# Altium PCB peripheral.PCBDOC (part 3 of 4)
Units mil, origin at the board's own origin, x right, y up, seen from the top; angles counter-clockwise.
Board outline 7500 x 3963 mil, 6 copper layers (Top Layer, Internal Plane 1, MidLayer1, MidLayer2, Internal Plane 2, Bottom Layer); 212 components, 387 nets, 1676 pads, 795 vias.
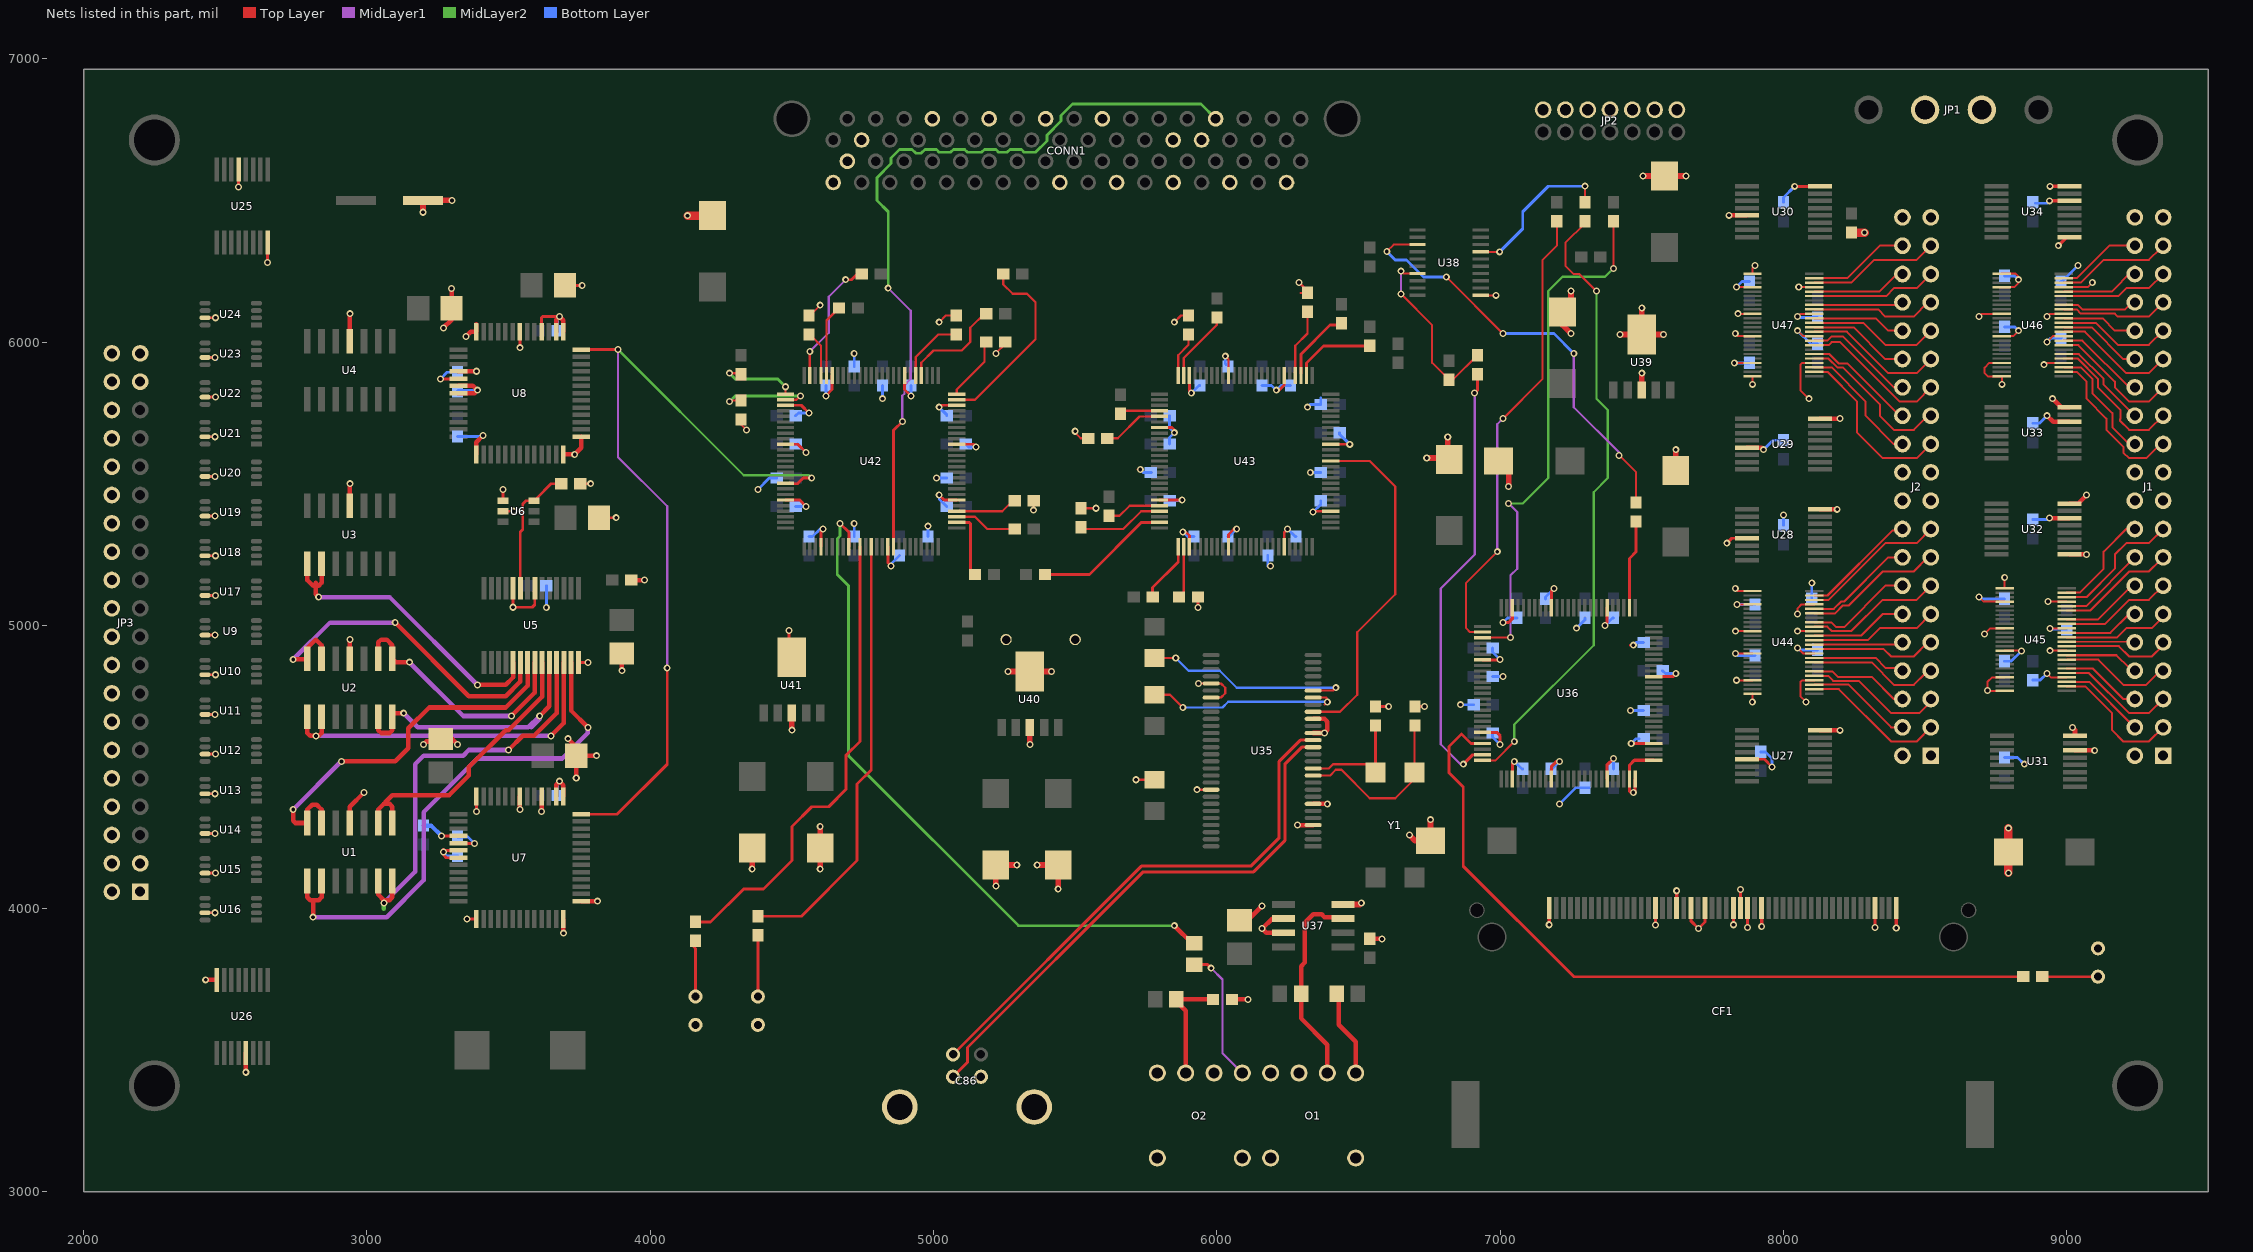
[diagram p7: the nets of this part, all layers, seen from the top]

## Via types
v1: diameter 25, hole 13.5, Top Layer to Bottom Layer, 795 vias

## Nets (pads, with @x,y where several pads share a name; then routed paths per layer and width w, separated by ;. In a path a pad name is that pad's centre, name@x,y a point inside that pad or via, vN(x,y) a via of type N, cw(c..) or ccw(c..) an arc to the next point about the centre after c; other vN are vias at no path point) (continued)
GND: C13.1 C14.1 C15.2 C16.2 C17.2 C18.1 C19.1 C20.1 C29.1 C30.1 C31.1 C32.2 C33.2 C34.2 C35.2 C36.1 C37.1 C38.1 C39.1 C40.1 C44.2 C45.2 C46.2 C47.2 C48.2 C49.2 C50.2 C51.2 C52.2 C53.2 C54.2 C55.2 C56.2 C57.2 C58.2 C59.2 C68.2 C69.2 C70.2 C71.2 C72.2 C73.2 C74.2 C75.2 C76.2 C77.2 C78.2 C79.2 C80.2 C81.2 C82.2 C83.2 C84.2 C85.1 C86.4 C86.5 C86.6 C88.2 C89.2 C90.2 C91.2 C92.2 C93.2 C94.2 C95.2 C96.2 C97.2 C98.2 C99.2 C100.2 C101.2 C102.2 C103.2 C104.2 C105.2 C106.2 C107.1 C108.1 C115.1 C116.1 C118.2 C119.2 C120.2 C121.2 C122.2 C123.2 C124.1 C125.1 C126.1 C127.1 C128.1 C129.1 C130.1 C131.1 C134.1 C135.1 C136.1 C137.2 C138.1 C139.1 C140.1 C141.1 C146.2 C147.2 C148.2 C149.2 C150.2 C151.2 C152.2 CF1.1 CF1.10 CF1.11 CF1.12 CF1.14 CF1.15 CF1.16 CF1.24 CF1.33 CF1.39 CF1.50 CONN1.1 CONN1.2 CONN1.17 CONN1.21 CONN1.25 CONN1.29 CONN1.33 CONN1.37 CONN1.42 CONN1.46 CONN1.50 CONN1.54 CONN1.59 CONN1.61 DS1.2 DS2.2 DS3.2 J1.1 J1.2 J1.19 J1.20 J1.21 J1.22 J1.39 J1.40 J2.1 J2.2 J2.19 J2.20 J2.21 J2.22 J2.39 J2.40 JP1.2 JP1.3 JP2.1 JP2.3 JP2.5 JP2.7 JP2.9 JP2.11 JP2.13 JP3.1 JP3.2 JP3.3 JP3.4 JP3.6 JP3.8 JP3.10 JP3.12 JP3.14 JP3.16 JP3.18 JP3.20 JP3.22 JP3.24 JP3.26 JP3.28 JP3.30 JP3.32 JP3.34 JP3.36 JP3.37 JP3.38 JP3.39 JP3.40 O1.3 O1.4 O1.5 O1.8 O2.2 O2.4 O2.5 O2.8 pad.0@5500,4950 pad.1@5256,4950 R1.1 R4.1 R5.1 R8.1 R10.1 R14.1 R17.1 R18.1 R21.1 R23.1 R27.1 U1.11 U2.11 U3.11 U4.11 U5.14 U5.21 U5.24 U6.1 U6.2 U7.4 U7.6 U7.7 U7.14 U7.26 U7.27 U7.40 U7.41 U7.43 U7.46 U7.52 U8.4 U8.6 U8.7 U8.14 U8.26 U8.27 U8.40 U8.41 U8.43 U8.46 U8.52 U9.7 U10.7 U11.7 U12.7 U13.7 U14.7 U15.7 U16.7 U17.7 U18.7 U19.7 U20.7 U21.7 U22.7 U23.7 U24.7 U25.8 U25.13 U26.8 U26.13 U27.8 U27.13 U28.8 U28.13 U29.8 U29.13 U30.8 U30.13 U31.6 U31.8 U32.1 U32.6 U32.8 U33.6 U33.8 U34.1 U34.6 U34.8 U35.4 U35.7 U35.17 U35.19 U35.33 U35.35 U35.48 U36.3 U36.10 U36.20 U36.24 U36.25 U36.26 U36.29 U36.41 U36.56 U36.66 U36.73 U36.82 U36.95 U37.4 U37.6 U37.7 U38.11 U39.3 U40.3 U41.3 U42.3 U42.10 U42.20 U42.29 U42.41 U42.56 U42.66 U42.73 U42.82 U42.95 U43.3 U43.10 U43.20 U43.29 U43.41 U43.56 U43.66 U43.73 U43.82 U43.95 U44.4 U44.10 U44.15 U44.21 U44.25 U44.28 U44.34 U44.39 U44.45 U44.48 U45.4 U45.10 U45.15 U45.21 U45.25 U45.28 U45.34 U45.39 U45.45 U45.48 U46.4 U46.10 U46.15 U46.21 U46.25 U46.28 U46.34 U46.39 U46.45 U46.48 U47.4 U47.10 U47.15 U47.21 U47.25 U47.28 U47.34 U47.39 U47.45 U47.48 | length 19395.9
  Top Layer w7: U38.11@6931.22,6164.84 v1(6985.16,6164.84) ; v1(7826.54,5926.54) 7826.93,5926.14 U47.45@7890.75,5926.14 ; v1(7830,5130) 7838.9,5121.1 U44.25@7890.75,5121.1 ; v1(7830,6030) 7839.37,6020.63 U47.39@7890.75,6020.63 ; v1(7830.63,4900.63) U44.39@7890.75,4900.63 ; v1(7830.63,4979.37) U44.34@7890.75,4979.37 ; v1(7833.86,4806.14) U44.45@7890.75,4806.14 ; v1(7833.86,6193.86) U47.28@7890.75,6193.86 ; v1(7836.14,5073.86) U44.28@7890.75,5073.86 ; v1(7840,6100) 7839.37,6099.37 U47.34@7890.75,6099.37 ; v1@7890.75,4740.75 U44.48@7890.75,4758.9 ; v1(7890.75,5850.75) U47.48@7890.75,5878.9 ; U47.25@7890.75,6241.1 7890.75,6260.75 v1(7900,6270) ; v1(8049.37,4979.37) U44.15@8109.25,4979.37 ; v1(8050,4920) 8069.37,4900.63 U44.10@8109.25,4900.63 ; v1(8050,5040) 8050,5060.2 8063.66,5073.86 U44.21@8109.25,5073.86 ; v1(8050,6040) 8069.37,6020.63 U47.10@8109.25,6020.63 ; v1(8050,6090) 8059.37,6099.37 U47.15@8109.25,6099.37 ; v1(8053.86,6193.86) U47.21@8109.25,6193.86 ; v1(8080,4730) 8060,4750 8060,4800 8066.14,4806.14 U44.4@8109.25,4806.14 ; v1(8090,5800) 8060,5830 8060,5920 8066.14,5926.14 U47.4@8109.25,5926.14 ; v1(8690,5100) 8706.14,5083.86 U45.28@8780.75,5083.86 ; v1(8690,6090) 8699.37,6099.37 U46.34@8770.75,6099.37 ; v1(8710,4970) 8729.37,4989.37 U45.34@8780.75,4989.37 ; v1(8770.75,5850.75) U46.48@8770.75,5878.9 8721.1,5878.9 8710,5890 8710,5910 8726.14,5926.14 U46.45@8770.75,5926.14 ; U46.39@8770.75,6020.63 8810.63,6020.63 v1(8830,6040) ; U46.28@8770.75,6193.86 8813.86,6193.86 8830,6210 8830,6230 8818.9,6241.1 U46.25@8770.75,6241.1 ; U45.48@8780.75,4768.9 8721.1,4768.9 v1(8720,4770) 8720,4800 8736.14,4816.14 U45.45@8780.75,4816.14 ; U45.39@8780.75,4910.63 8839.37,4910.63 v1(8840,4910) ; U45.25@8780.75,5131.1 v1(8780.75,5169.25) ; v1(8920,5920) 8926.14,5926.14 U46.4@8989.25,5926.14 ; v1(8930,4830) 8943.86,4816.14 U45.4@8999.25,4816.14 ; v1(8930,6000) 8950.63,6020.63 U46.10@8989.25,6020.63 ; v1(8930,6090) 8939.37,6099.37 U46.15@8989.25,6099.37 ; v1(8933.86,5083.86) U45.21@8999.25,5083.86 ; v1(8940.63,4910.63) U45.10@8999.25,4910.63 ; v1(8940.63,4989.37) U45.15@8999.25,4989.37 ; U46.21@8989.25,6193.86 9073.86,6193.86 v1(9090,6210)
  Top Layer w8: R10.1@4320,5726.54 4320,5710 v1(4340,5690) ; R8.1@4560,6093.46 4563.46,6093.46 v1(4600,6130) ; v1(5020,6070) 5043.46,6093.46 R5.1@5080,6093.46 ; v1(5220,5960) 5253.46,5993.46 R4.1@5253.46,6000 ; v1(5353.46,5406.54) R1.1@5353.46,5440 ; v1@5500,5680 5520,5660 R18.1@5546.54,5660 ; R21.1@5520,5413.46 v1(5573.46,5413.46) ; v1(5714.88,4455.12) R27.1@5780,4455.12 ; v1@5720,5550 v1(5730,5550) ; v1(5850,6070) 5873.46,6093.46 R17.1@5900,6093.46 ; v1(5930,4420) U35.48@5980,4420 ; v1(5935,4795) 6015,4795 6030,4780 6030,4760 6015,4745 U35.35@5980,4745 ; v1(6030,5950) 6040.94,5939.06 U43.66@6040.94,5882.17 ; v1(6290,6210) 6320,6180 R14.1@6320,6173.46 6296.54,6173.46
  Top Layer w10: U16.7@2428.9,3985.59 v1(2464.41,3985.59) ; U15.7@2428.9,4125.59 v1(2465.59,4125.59) ; U14.7@2428.9,4265.59 v1(2464.41,4265.59) ; U13.7@2428.9,4405.59 v1(2464.41,4405.59) ; U12.7@2428.9,4545.59 v1(2465.59,4545.59) ; U11.7@2428.9,4685.59 v1(2464.41,4685.59) ; U10.7@2428.9,4825.59 v1(2465.59,4825.59) ; U9.7@2428.9,4965.59 v1(2464.41,4965.59) ; U17.7@2428.9,5105.59 v1(2465.59,5105.59) ; U18.7@2428.9,5245.59 v1(2465.59,5245.59) ; U19.7@2428.9,5385.59 v1(2464.41,5385.59) ; U20.7@2428.9,5525.59 v1(2464.41,5525.59) ; U21.7@2428.9,5665.59 v1(2464.41,5665.59) ; U22.7@2428.9,5805.59 v1(2465.59,5805.59) ; U23.7@2428.9,5945.59 v1(2464.41,5945.59) ; U24.7@2428.9,6085.59 v1(2465.59,6085.59) ; v1(2547.21,6547.21) U25.13@2547.21,6608.94 ; v1(2649.57,6280.43) U25.8@2649.57,6351.06 ; v1(3263.23,4256.77) U7.4@3323.46,4256.77 ; U7.7@3323.46,4180 3280,4180 3270,4190 3270,4210 3274.41,4205.59 U7.6@3323.46,4205.59 ; v1(3353.46,3963.46) U7.14@3386.46,3963.46 ; v1(3386.46,4343.54) U7.52@3386.46,4396.54 ; U6.2@3480,5402.6 v1(3517.4,5402.6) ; U6.1@3480,5440 v1(3480,5480) ; U5.24@3516.02,5130.91 v1(3516.02,5063.98) 3583.98,5063.98 3592.8,5072.8 U5.21@3592.8,5130.91 ; v1(3540,5980) U8.46@3540,6036.54 ; U8.43@3616.77,6036.54 3616.77,6086.77 3620,6090 v1(3680,6090) ; C32.2@3699.06,6200 v1(3760,6200) ; U5.14@3746.34,4869.09 v1(3780.91,4869.09) ; C15.2@3753.46,5500 v1(3790,5500) ; C16.2@3819.06,5380 v1(3880,5380) ; U42.20@4477.83,5442.2 4527.8,5442.2 v1(4550,5420) ; U42.10@4477.83,5639.06 4520.94,5639.06 v1(4550,5610) ; U42.3@4477.83,5776.85 4533.15,5776.85 v1(4560,5750) ; U41.3@4490,4880 v1(4490,4982) ; U42.29@4602.83,5277.83 4602.83,5332.83 v1(4610,5340) ; v1(4620,5810) 4642.2,5832.2 U42.95@4642.2,5882.17 ; U42.41@4839.06,5277.83 4839.06,5220.94 v1(4850,5210) ; U42.82@4898.11,5882.17 4898.11,5831.89 v1(4920,5810) ; v1(5020,5460) 5037.8,5442.2 U42.56@5082.17,5442.2 ; v1(5020,5770) 5026.85,5776.85 U42.73@5082.17,5776.85 ; U42.66@5082.17,5639.06 5140.94,5639.06 v1(5150,5630) ; U43.95@5797.83,5442.2 v1(5877.8,5442.2) ; U43.82@5797.83,5698.11 5841.89,5698.11 5850,5690 v1(5850,5680) ; v1(5880,5330) 5890,5330 5903.15,5316.85 U43.3@5903.15,5277.83 ; U43.73@5903.15,5882.17 5903.15,5826.85 v1(5910,5820) ; v1(5933.46,5063.46) R23.1@5933.46,5100 ; U43.10@6040.94,5277.83 6040.94,5320.94 6060,5340 v1(6070,5340) ; v1(6210,5830) 6220,5830 6237.8,5847.8 U43.56@6237.8,5882.17 ; U43.20@6237.8,5277.83 6237.8,5327.8 v1(6250,5340) ; v1(6340,5400) 6342.83,5402.83 U43.29@6402.17,5402.83 ; U43.41@6402.17,5639.06 v1(6469.06,5639.06) ; v1@7460,4930 v1(7470,4930) ; v1(7800,5290) 7817.21,5307.21 U28.13@7871.06,5307.21 ; U27.13@7871.06,4527.21 7932.8,4527.21 v1(7960,4500)
  Top Layer w11: C84.2@6560,4713.46 v1(6606.54,4713.46) ; C85.1@6700,4713.46 v1(6733.46,4713.46) ; U36.95@6937.83,4622.2 6987.8,4622.2 7000,4610 v1(7000,4580) ; U36.82@6937.83,4878.11 6998.11,4878.11 v1(7000,4880) ; v1(7010,5010) 7030,5010 7043.15,5023.15 U36.73@7043.15,5062.17 ; U36.3@7043.15,4457.83 7043.15,4513.15 v1(7050,4520) ; v1(7173.13,3943.13) CF1.1@7173.13,4002.36 ; U36.10@7180.94,4457.83 7180.94,4500.94 7200,4520 v1(7210,4520) ; U36.66@7180.94,5062.17 7180.94,5120.94 v1(7190,5130) ; v1(7370,5000) 7377.8,5007.8 U36.56@7377.8,5062.17 ; U36.20@7377.8,4457.83 7377.8,4507.8 v1(7400,4530) ; v1(7462.83,4582.83) U36.29@7542.17,4582.83 ; U36.25@7476.22,4457.83 7476.22,4416.22 v1(7470,4410) 7460,4410 7456.54,4413.46 7456.54,4506.54 7473.78,4523.78 U36.26@7542.17,4523.78 ; U36.41@7542.17,4819.06 7609.06,4819.06 v1(7620,4830) ; v1(7548.13,3941.87) CF1.33@7548.13,4002.36 ; CF1.10@7623.13,4002.36 v1(7623.13,4063.13) ; CF1.11@7673.13,4002.36 7673.13,3956.87 v1(7700,3930) 7723.13,3953.13 CF1.12@7723.13,4002.36 ; v1(7823.13,3943.13) CF1.14@7823.13,4002.36 ; CF1.39@7848.13,4002.36 v1(7848.13,4068.13) ; v1(7873.13,3933.13) CF1.15@7873.13,4002.36 ; v1(7923.13,3936.87) CF1.16@7923.13,4002.36 ; v1(8039.57,6549.57) U30.8@8128.94,6549.57 ; v1(8323.13,3933.13) CF1.24@8323.13,4002.36 ; v1(8398.13,3931.87) CF1.50@8398.13,4002.36
  Top Layer w12: v1(8938.39,6498.39) U34.6@9008.94,6498.39 ; v1(8940.43,6549.57) U34.8@9008.94,6549.57 ; v1(8970,6340) 9000.43,6370.43 U34.1@9008.94,6370.43
  Top Layer w16: v1(2431.06,3748.94) U26.8@2470.43,3748.94 ; v1(2572.8,3422.8) U26.13@2572.8,3491.06 ; U1.11@2940,4302.36 2940,4360 v1(2990,4410) ; U2.11@2940,4882.36 v1(2940,4950) ; U3.11@2940,5422.36 v1(2940,5500) ; U4.11@2940,6002.36 v1(2940,6100) ; v1(3200,4580) 3210,4590 C35.2@3260,4590 ; C35.2@3260,4599.06 3300.94,4599.06 v1(3320,4580) ; v1(3270,6050) 3299.06,6079.06 v1(3299.06,6189.06) ; U8.7@3323.46,5820 3380,5820 v1(3390,5830) 3374.41,5845.59 U8.6@3323.46,5845.59 ; U8.4@3323.46,5896.77 v1(3386.77,5896.77) ; v1(3350,6020) 3366.54,6036.54 U8.52@3386.46,6036.54 U8.52@3386.46,6063.54 ; U8.14@3386.46,5603.46 3386.46,5646.46 v1(3410,5670) ; v1(3540,4350) U7.46@3540,4396.54 ; v1(3616.77,4343.23) U7.43@3616.77,4396.54 ; U7.41@3667.95,4396.54 3667.95,4437.95 v1(3680,4450) 3693.54,4436.46 U7.40@3693.54,4396.54 ; U8.41@3667.95,6036.54 3667.95,6077.95 v1(3680,6090) 3693.54,6076.46 U8.40@3693.54,6036.54 ; v1(3693.54,3913.54) U7.26@3693.54,3963.46 ; U8.26@3693.54,5603.46 v1(3733.46,5603.46) 3756.54,5626.54 U8.27@3756.54,5666.46 ; v1(3710,4600) C34.2@3740,4570 ; v1(3739.06,4460.94) C34.2@3739.06,4540 v1(3810,4540) ; U7.27@3756.54,4026.46 v1(3813.54,4026.46) ; v1(3900,4840) C17.2@3900,4900.94 ; C14.1@3933.46,5160 v1(3980,5160) ; C105.2@6053.46,3680 v1(6110,3680) ; C106.2@6080,3959.06 6109.06,3959.06 v1(6160,4010) ; U37.7@6234.69,3915 6175,3915 v1(6160,3930) 6195,3965 U37.6@6234.69,3965 ; v1(6285,4295) U35.4@6340,4295 ; U35.7@6340,4370 v1(6390,4370) ; U35.17@6340,4620 v1(6380,4620) 6390,4630 6390,4660 6380,4670 U35.19@6340,4670 ; C104.2@6540,3893.46 v1(6583.46,3893.46) ; v1(7807.21,6447.21) U30.13@7871.06,6447.21 ; U29.13@7871.06,5627.21 7922.8,5627.21 v1(7930,5620) ; U27.8@8128.94,4629.57 v1(8199.57,4629.57) ; U28.8@8128.94,5409.57 v1(8189.57,5409.57) ; U29.8@8128.94,5729.57 v1(8199.57,5729.57) ; v1(8930,5740) 8951.61,5718.39 U33.6@9008.94,5718.39 ; v1(8938.39,5378.39) U32.6@9008.94,5378.39 ; v1(8950,5800) 8980.43,5769.57 U33.8@9008.94,5769.57 ; U32.1@9008.94,5250.43 v1(9069.57,5250.43) ; U32.8@9008.94,5429.57 9039.57,5429.57 v1(9070,5460) ; v1(9020,4640) 9028.94,4631.06 U31.8@9028.94,4609.57 ; U31.6@9028.94,4558.39 v1(9098.39,4558.39)
  Top Layer w20: v1(3198.11,6458.11) C123.2@3198.11,6500 v1(3300,6500) ; v1(4360,4140) C149.2@4360,4214.02 ; v1(4500,4630) U41.3@4500,4690 ; v1(4600,4140) v1(4600,4290) ; v1(5220,4080) C148.2@5220,4154.02 v1(5294.02,4154.02) ; v1(5263.15,4836.85) v1(5416.85,4836.85) ; v1(5340,4580) U40.3@5340,4640 ; v1(5365.98,4154.02) C152.2@5440,4154.02 v1(5440,4070) ; U37.4@6445.32,4015 6505,4015 v1(6510,4020) ; v1(6680,4260) 6700,4240 C119.2@6754.02,4240 v1(6754.02,4314.02) ; v1(6740.93,5590.93) 6814.94,5590.93 v1(6814.94,5664.94) ; C146.2@6994.02,5580 6994.02,5575.98 7030,5540 v1(7030,5490) ; C118.2@7220,6105.98 7220,6060 v1(7250,6030) ; C118.2@7250,6110 v1(7250,6180) ; v1(7423.15,6026.85) v1(7576.85,6026.85) ; U39.3@7500,5830 v1(7500,5890) ; U39.3@7500,6026.85 v1(7500,6120) ; v1(7504.02,6585.98) v1(7655.98,6585.98) ; C122.2@7620,5545.98 v1(7620,5620)
  Top Layer w30: v1(4132.02,6445.98) C151.2@4220,6445.98 ; C36.1@8240,6386.54 v1(8286.54,6386.54) ; v1(8794.02,4125.98) v1(8794.02,4284.02)
  MidLayer1 w8: v1(7576.85,6026.85) v1@7580,6030
  MidLayer1 w16: v1@4131,6447 v1(4132.02,6445.98)
  MidLayer2 w8: v1@2430,3750 v1(2431.06,3748.94)
  Bottom Layer w10: v1(2464.41,5525.59) v1@2470,5520 ; v1(2464.41,5945.59) v1@2470,5940 ; v1(3270,4200) 3283.46,4186.54 C20.1@3320,4186.54 ; C19.1@3320,5666.54 3406.54,5666.54 v1(3410,5670) ; C31.1@3320,5826.54 3323.46,5830 v1(3390,5830) ; v1(3633.46,5063.46) C13.1@3633.46,5140 ; C29.1@3673.46,4400 3673.46,4443.46 v1(3680,4450) ; C18.1@3673.46,6040 v1@3673.46,6083.46 ; v1(4380,5480) 4420,5520 C54.2@4446.54,5520 ; C44.2@4513.46,5420 v1(4550,5420) ; C45.2@4513.46,5740 4523.46,5750 v1(4560,5750) ; C57.2@4520,5640 v1(4550,5610) ; C50.2@4560,5313.46 4573.46,5313.46 4600,5340 v1(4610,5340) ; v1(4620,5810) C47.2@4620,5846.54 ; C58.2@4720,5313.46 v1(4720,5360) ; C52.2@4720,5913.46 v1(4720,5960) ; v1(4820,5800) C59.2@4820,5846.54 ; v1(4850,5210) 4850,5216.54 C53.2@4880,5246.54 ; v1(4920,5810) C46.2@4920,5846.54 ; C49.2@4980,5313.46 v1(4980,5350) ; v1(5010,5520) C56.2@5046.54,5520 ; v1(5020,5460) 5020,5446.54 C51.2@5046.54,5420 ; v1(5020,5770) 5046.54,5743.46 C48.2@5046.54,5740 ; C55.2@5113.46,5640 5123.46,5630 v1(5150,5630) ; v1(5730,5550) 5740,5540 C78.2@5770,5540 ; C73.2@5833.46,5440 5875.59,5440 v1(5877.8,5442.2) ; C81.2@5833.46,5640 5833.46,5663.46 v1(5850,5680) 5833.46,5696.54 C72.2@5833.46,5740 ; v1(5880,5330) 5896.54,5313.46 C75.2@5920,5313.46 ; v1(5910,5820) 5936.54,5846.54 C71.2@5940,5846.54 ; v1(6030,5950) 6030,5923.46 C79.2@6033.46,5920 ; C82.2@6040,5313.46 6043.46,5313.46 v1(6070,5340) ; C80.2@6160,5846.54 6193.46,5846.54 v1(6210,5830) 6226.54,5846.54 C70.2@6260,5846.54 ; v1@6180,5210 C77.2@6180,5246.54 ; v1(6250,5340) 6276.54,5313.46 C74.2@6280,5313.46 ; v1(6320,5770) 6330,5780 C69.2@6366.54,5780 6366.54,5803.46 ; v1(6330,5540) C83.2@6366.54,5540 ; v1(6340,5400) 6366.54,5426.54 C68.2@6366.54,5440 ; C76.2@6433.46,5680 6433.46,5674.65 v1(6469.06,5639.06) ; v1(6860,4720) C99.2@6906.54,4720 ; C94.2@6973.46,4620 6973.46,4606.54 v1(7000,4580) ; C100.2@6973.46,4820 v1(7010,4820) ; C95.2@6973.46,4920 6973.46,4906.54 v1(7000,4880) ; v1(7010,5010) 7026.54,5026.54 C88.2@7060,5026.54 ; v1(7050,4520) 7076.54,4493.46 C93.2@7080,4493.46 ; C98.2@7160,5093.46 7160,5100 v1(7190,5130) ; C103.2@7180,4493.46 7183.46,4493.46 v1(7210,4520) ; v1(7210,4370) 7266.54,4426.54 C96.2@7313.46,4426.54 ; v1(7270,4990) 7300,5020 C101.2@7300,5026.54 ; v1(7370,5000) 7396.54,5026.54 C89.2@7400,5026.54 ; C92.2@7400,4493.46 v1(7400,4530) ; v1(7460,4700) C102.2@7506.54,4700 ; v1(7462.83,4582.83) 7480,4600 C91.2@7490,4600 ; v1(7470,4930) 7480,4940 C90.2@7506.54,4940 ; C97.2@7573.46,4840 7583.46,4830 v1(7620,4830) ; v1(7826.54,5926.54) C139.1@7880,5926.54 ; v1(7830.63,4900.63) 7837.79,4893.46 C141.1@7900,4893.46 ; v1(7833.86,6193.86) 7853.46,6213.46 C138.1@7880,6213.46 ; v1(7836.14,5073.86) 7836.54,5073.46 C140.1@7900,5073.46 ; C128.1@7920,4553.46 7936.54,4553.46 7960,4530 v1(7960,4500) ; v1(7930,5620) 7963.46,5653.46 C126.1@8000,5653.46 ; C127.1@8000,5353.46 v1(8000,5390) ; C124.1@8000,6493.46 8000,6510 v1(8039.57,6549.57) ; v1(8050,4920) 8056.54,4913.46 C40.1@8120,4913.46 ; v1(8050,6040) 8096.54,5993.46 C38.1@8120,5993.46 ; v1(8050,6090) 8053.46,6086.54 C37.1@8120,6086.54 ; C39.1@8100,5093.46 v1(8100,5150) ; v1(8690,5100) 8696.54,5093.46 C116.1@8780,5093.46 ; C129.1@8780,4533.46 8826.54,4533.46 v1(8850,4510) ; C115.1@8780,4873.46 8803.46,4873.46 v1(8840,4910) ; C108.1@8780,6053.46 8816.54,6053.46 v1(8830,6040) ; C107.1@8780,6233.46 8816.54,6233.46 v1(8830,6220) ; C134.1@8880,4806.54 8906.54,4806.54 v1(8930,4830) ; C130.1@8880,5373.46 8933.46,5373.46 v1(8938.39,5378.39) ; C131.1@8880,5713.46 8903.46,5713.46 v1(8930,5740) ; C125.1@8890,6490 8930,6490 v1(8938.39,6498.39) ; v1(8930,6000) 8943.46,6013.46 C135.1@8980,6013.46 ; v1(8940.63,4989.37) 8943.46,4986.54 C137.2@9000,4986.54 ; C136.1@8980,6213.46 8983.46,6213.46 v1(9040,6270)
  Bottom Layer w16: C30.1@3200,4293.46 3226.54,4293.46 v1(3263.23,4256.77)
  other v1: 7890,4730 6190,5210 5500,5685
IFCLK: U35.20 U43.38 | length 1235.9
  Top Layer w8: U35.20@6340,4695 6435,4695 6495.26,4755.26 6495.26,4975.26 6630,5110 6630,5490 6540,5580 U43.38@6402.17,5580
INIT: CONN1.56 U43.42 | length 1734.1
  Top Layer w10: U43.42@6402.17,5658.74 6448.74,5658.74 v1(6520,5730)
  MidLayer1 w8: v1(6380,6230) 6380,6030 6520,5890 v1(6520,5730)
  MidLayer2 w10: v1(5830,6460) 5840,6450 6160,6450 v1(6380,6230)
  Bottom Layer w10: CONN1.56@5696,6788 5696,6704 5740,6660 5740,6630 5800,6570 5800,6490 v1(5830,6460)
INIT: CONN1.62 U42.42 | length 2782.3
  Top Layer w10: U42.42@4858.74,5277.83 4858.74,5688.74 v1(4890,5720)
  MidLayer1 w8: v1(4840,6190) 4920,6110 4920,5870 4897.85,5847.85 4897.85,5817.85 4890,5810 v1(4890,5720)
  MidLayer2 w10: v1(4840,6190) 4840,6460 4800,6500 4800,6580 4850,6630 4850,6650 4880,6680 4924.29,6680 4938.22,6666.07 4956.07,6666.07 4970,6680 5010,6680 5020,6670 5060,6670 5070,6680 5110,6680 5120,6670 5170,6670 5180,6680 5220,6680 5230,6670 5260,6670 5270,6680 5310,6680 5320,6670 5360,6670 5400,6710 5400,6730 5450,6780 5450,6800 5490,6840 5944,6840 CONN1.62@5996,6788
L\D\A\C\: U7.39 U8.39 U42.17 | length 3001.6
  Top Layer w10: U7.39@3756.54,4333.54 3883.54,4333.54 4060,4510 v1(4060,4850) ; U8.39@3756.54,5973.54 v1(3886.46,5973.54) ; U42.17@4490,5500 4520,5500 4540,5520 v1(4570,5520)
  MidLayer1 w8: v1(3886.46,5973.54) 3886.46,5593.54 4060,5420 v1(4060,4850)
  MidLayer2 w8: v1(3886.46,5973.54) 4330,5530 4560,5530 v1(4570,5520)
LED0: R38.2 U42.38 | length 1560
  Top Layer w10: R38.2@4380,3973.46 4533.46,3973.46 4730,4170 4730,4440 4780,4490 U42.38@4780,5277.83
LED1: R39.2 U42.36 | length 1672.3
  Top Layer w10: R39.2@4160,3953.46 4213.46,3953.46 4330,4070 4400,4070 4500,4170 4500,4290 4570,4360 4630,4360 4691.63,4421.63 4691.63,4541.63 4740.63,4590.63 U42.36@4740.63,5277.83
NetC15_1: C15.1 U5.23 U6.6 | length 453.2
  Top Layer w10: U5.23@3541.61,5130.91 3541.61,5330 3550,5338.39 3550,5428.39 3561.61,5440 U6.6@3590.24,5440 ; U6.6@3600,5450 3650,5500 C15.1@3686.54,5500
NetC20_2: C20.2 U7.5 | length 139.7
  Top Layer w10: U7.5@3310,4230 v1(3380,4230)
  Bottom Layer w10: C20.2@3320,4253.46 3356.54,4253.46 v1(3380,4230)
NetC31_2: C31.2 U8.5 | length 139.7
  Top Layer w10: v1(3260,5870) U8.5@3330,5870
  Bottom Layer w10: v1(3260,5870) 3283.46,5893.46 C31.2@3320,5893.46
NetC84_1: C84.1 U35.12 Y1.1 | length 444.5
  Top Layer w8: U35.12@6340,4495 6395,4495 6410,4510 6540,4510 Y1.1@6560,4490 ; Y1.1@6560,4480 6560,4530
  Top Layer w11: Y1.1@6560,4480 C84.1@6560,4640
NetC85_2: C85.2 U35.11 Y1.2 | length 602.3
  Top Layer w8: U35.11@6340,4470 6400,4470 6420,4490 6440,4490 6540,4390 6630,4390 Y1.2@6700,4460 ; Y1.2@6697.8,4480 6697.8,4631.26 C85.2@6706.54,4640
NetC86_2: C86.2 U35.16 | length 1888.8
  Top Layer w11: C86.2@5068.95,3485.43 5733.51,4150 6120,4150 6220,4250 6220,4520 6295,4595 U35.16@6340,4595
NetC86_3: C86.3 U35.15 | length 1941.7
  Top Layer w11: C86.3@5068.95,3406.69 5120,3457.75 5120,3510 5740,4130 6130,4130 6240,4240 6240,4510 6300,4570 U35.15@6340,4570
NetC105_1: C105.1 O2.3 R37.2 | length 405.7
  Top Layer w16: R37.2@5850,3680 5890,3640 O2.3@5890,3420 ; R37.2@5857.4,3680 C105.1@5986.54,3680
NetDS1_1: DS1.1 R33.1 | length 210
  Top Layer w10: R33.1@8900,3760 DS1.1@9110,3760
NetDS2_1: DS2.1 R38.1 | length 230.7
  Top Layer w10: DS2.1@4370,3680 DS2.1@4380,3690 R38.1@4380,3906.54
NetDS3_1: DS3.1 R39.1 | length 194.1
  Top Layer w10: DS3.1@4160,3690 4160,3860 4150,3870 R39.1@4160,3870
NetJ1_3: J1.3 U45.2 | length 477.2
  Top Layer w7: U45.2@8999.25,4784.65 9065.35,4784.65 9160,4690 9160,4630 9200,4590 9290,4590 J1.3@9340,4640
NetJ1_4: J1.4 U45.3 | length 293
  Top Layer w7: U45.3@8999.25,4800.39 9079.61,4800.39 J1.4@9230,4650
NetJ1_5: J1.5 U45.5 | length 420.2
  Top Layer w7: U45.5@8999.25,4831.89 9078.11,4831.89 9220,4690 9290,4690 J1.5@9340,4740
NetJ1_6: J1.6 U45.6 | length 295.3
  Top Layer w7: U45.6@8999.25,4847.64 9092.36,4847.64 9200,4740 J1.6@9250,4740
NetJ1_7: J1.7 U45.8 | length 388.4
  Top Layer w7: U45.8@9000,4880 9111.61,4880 ; 9110.87,4879.13 9200,4790 9280,4790 J1.7@9330,4840
NetJ1_8: J1.8 U45.9 | length 250.1
  Top Layer w7: 9175.12,4893.46 9175.87,4893.46 ; 9175.12,4894.88 9220,4850 J1.8@9230,4850
  Top Layer w8: U45.9@8999.25,4894.88 9175.12,4894.88
NetJ1_9: J1.9 U45.11 | length 372.4
  Top Layer w7: U45.11@8999.25,4926.38 9183.62,4926.38 9220,4890 9300,4890 J1.9@9340,4930
NetJ1_10: J1.10 U45.12 | length 261.6
  Top Layer w7: U45.12@8999.25,4942.13 9257.87,4942.13 J1.10@9260,4940
NetJ1_11: J1.11 U45.13 | length 370.6
  Top Layer w7: U45.13@8999.25,4957.87 9177.87,4957.87 9210,4990 9300,4990 J1.11@9340,5030
NetJ1_12: J1.12 U45.14 | length 268.2
  Top Layer w7: U45.14@8999.25,4973.62 9153.62,4973.62 9220,5040 J1.12@9240,5040
NetJ1_13: J1.13 U45.16 | length 396.6
  Top Layer w7: U45.16@8999.25,5005.12 9135.12,5005.12 9220,5090 9290,5090 J1.13@9340,5140
NetJ1_14: J1.14 U45.17 | length 290.1
  Top Layer w7: U45.17@8999.25,5020.87 9110.87,5020.87 9230,5140 J1.14@9240,5140
NetJ1_15: J1.15 U45.19 | length 404.3
  Top Layer w7: U45.19@8999.25,5052.36 9082.36,5052.36 9220,5190 9290,5190 J1.15@9330,5230
NetJ1_16: J1.16 U45.20 | length 311.9
  Top Layer w7: U45.20@8999.25,5068.11 9068.11,5068.11 J1.16@9240,5240
NetJ1_17: J1.17 U45.22 | length 469.6
  Top Layer w7: U45.22@8999.25,5099.61 9069.61,5099.61 9170,5200 9170,5250 9210,5290 9290,5290 J1.17@9340,5340
NetJ1_18: J1.18 U45.23 | length 368.9
  Top Layer w7: U45.23@8999.25,5115.35 9045.35,5115.35 9130,5200 9130,5260 9210,5340 J1.18@9240,5340
NetJ1_23: J1.23 U46.2 | length 557.9
  Top Layer w7: U46.2@8989.25,5894.65 9035.35,5894.65 9070,5860 9070,5800 9140,5730 9140,5690 9200,5630 9200,5610 9220,5590 9280,5590 J1.23@9330,5640
NetJ1_24: J1.24 U46.3 | length 421.3
  Top Layer w7: U46.3@8989.25,5910.39 9049.61,5910.39 9090,5870 9090,5820 9160.68,5749.32 9160.68,5699.32 9220,5640 J1.24@9240,5640
NetJ1_25: J1.25 U46.5 | length 518.7
  Top Layer w7: U46.5@8989.25,5941.89 9038.11,5941.89 9110,5870 9110,5840 9190,5760 9190,5730 9187.71,5727.71 9187.71,5722.29 9220,5690 9290,5690 J1.25@9340,5740
NetJ1_26: J1.26 U46.6 | length 338.5
  Top Layer w7: U46.6@8989.25,5957.64 9042.36,5957.64 9130,5870 9130,5850 J1.26@9230,5750
NetJ1_27: J1.27 U46.8 | length 465.7
  Top Layer w7: U46.8@8989.25,5989.13 9040.87,5989.13 9170,5860 9170,5840 9220,5790 9290,5790 J1.27@9340,5840
NetJ1_28: J1.28 U46.9 | length 329
  Top Layer w7: U46.9@8989.25,6004.88 9055.12,6004.88 9220,5840 J1.28@9250,5840
NetJ1_29: J1.29 U46.11 | length 417.9
  Top Layer w7: U46.11@8989.25,6036.38 9063.62,6036.38 9210,5890 9290,5890 J1.29@9330,5930
NetJ1_30: J1.30 U46.12 | length 307.2
  Top Layer w7: U46.12@8989.25,6052.13 9087.87,6052.13 9200,5940 J1.30@9250,5940
NetJ1_31: J1.31 U46.13 | length 403.7
  Top Layer w7: U46.13@8989.25,6067.87 9102.13,6067.87 9180,5990 9290,5990 J1.31@9340,6040
NetJ1_32: J1.32 U46.14 | length 258.8
  Top Layer w7: U46.14@8989.25,6083.62 9126.38,6083.62 9170,6040 J1.32@9230,6040
NetJ1_33: J1.33 U46.16 | length 381.9
  Top Layer w7: U46.16@8989.25,6115.12 9034.88,6115.12 9050,6100 9170,6100 9180,6090 9290,6090 J1.33@9340,6140
NetJ1_34: J1.34 U46.17 | length 265.6
  Top Layer w7: U46.17@8989.25,6130.87 9039.13,6130.87 9056,6114 9204,6114 J1.34@9235,6145
NetJ1_35: J1.35 U46.19 | length 382.9
  Top Layer w7: U46.19@8989.25,6162.36 9182.36,6162.36 9210,6190 9290,6190 J1.35@9340,6240
NetJ1_36: J1.36 U46.20 | length 270.5
  Top Layer w7: U46.20@8989.25,6178.11 9158.11,6178.11 J1.36@9230,6250
NetJ1_37: J1.37 U46.22 | length 390.6
  Top Layer w7: U46.22@8989.25,6209.61 9049.61,6209.61 9130,6290 9290,6290 J1.37@9330,6330
NetJ1_38: J1.38 U46.23 | length 298.2
  Top Layer w7: U46.23@8989.25,6225.35 9035.35,6225.35 9150,6340 J1.38@9240,6340
NetJ2_3: J2.3 U44.2 | length 507.9
  Top Layer w7: U44.2@8109.25,4774.65 8195.35,4774.65 8380,4590 8470,4590 J2.3@8520,4640
NetJ2_4: J2.4 U44.3 | length 383
  Top Layer w7: U44.3@8109.25,4790.39 8229.61,4790.39 8380,4640 J2.4@8430,4640
NetJ2_5: J2.5 U44.5 | length 481.9
  Top Layer w7: U44.5@8109.25,4821.89 8158.11,4821.89 8175.61,4804.39 8265.61,4804.39 8380,4690 8480,4690 J2.5@8520,4730
NetJ2_6: J2.6 U44.6 | length 351.2
  Top Layer w7: U44.6@8109.25,4837.64 8172.36,4837.64 8191.61,4818.39 8311.61,4818.39 8390,4740 J2.6@8420,4740
NetJ2_7: J2.7 U44.8 | length 440.1
  Top Layer w7: U44.8@8109.25,4869.13 8310.87,4869.13 8390,4790 8460,4790 J2.7@8500,4830
NetJ2_8: J2.8 U44.9 | length 335.2
  Top Layer w7: U44.9@8109.25,4884.88 8325.12,4884.88 8360,4850 J2.8@8430,4850
NetJ2_9: J2.9 U44.11 | length 432.4
  Top Layer w7: U44.11@8109.25,4916.38 8353.62,4916.38 8380,4890 8460,4890 J2.9@8510,4940
NetJ2_10: J2.10 U44.12 | length 314
  Top Layer w7: U44.12@8109.25,4932.13 8412.13,4932.13 J2.10@8420,4940
NetJ2_11: J2.11 U44.13 | length 448.9
  Top Layer w7: U44.13@8109.25,4947.87 8297.87,4947.87 8340,4990 8470,4990 J2.11@8520,5040
NetJ2_12: J2.12 U44.14 | length 342.4
  Top Layer w7: U44.14@8109.25,4963.62 8273.62,4963.62 8350,5040 J2.12@8420,5040
NetJ2_13: J2.13 U44.16 | length 483.3
  Top Layer w7: U44.16@8109.25,4995.12 8154.88,4995.12 8170,4980 8240,4980 8350,5090 8470,5090 J2.13@8520,5140
NetJ2_14: J2.14 U44.17 | length 378.2
  Top Layer w7: U44.17@8109.25,5010.87 8169.13,5010.87 8186,4994 8214,4994 8360,5140 J2.14@8420,5140
NetJ2_15: J2.15 U44.19 | length 482.6
  Top Layer w7: U44.19@8109.25,5042.36 8182.36,5042.36 8210,5070 8230,5070 8350,5190 8460,5190 J2.15@8510,5240
NetJ2_16: J2.16 U44.20 | length 396.1
  Top Layer w7: U44.20@8109.25,5058.11 8178.11,5058.11 8204.22,5084.22 8214.22,5084.22 8370,5240 J2.16@8430,5240
NetJ2_17: J2.17 U44.22 | length 514.5
  Top Layer w7: U44.22@8109.25,5089.61 8159.61,5089.61 8360,5290 8470,5290 J2.17@8520,5340
NetJ2_18: J2.18 U44.23 | length 412.1
  Top Layer w7: U44.23@8109.25,5105.35 8155.35,5105.35 8384.21,5334.21 8404.21,5334.21 J2.18@8420,5350
NetJ2_23: J2.23 U47.2 | length 622.1
  Top Layer w7: U47.2@8109.25,5894.65 8155.35,5894.65 8260,5790 8260,5680 8350,5590 8470,5590 J2.23@8520,5640
NetJ2_24: J2.24 U47.3 | length 452
  Top Layer w7: U47.3@8109.25,5910.39 8169.61,5910.39 8290,5790 8290,5740 8390,5640 J2.24@8420,5640
NetJ2_25: J2.25 U47.5 | length 549.2
  Top Layer w7: U47.5@8109.25,5941.89 8158.11,5941.89 8189.8,5910.2 8209.8,5910.2 8340,5780 8340,5740 8390,5690 8460,5690 J2.25@8510,5740
NetJ2_26: J2.26 U47.6 | length 386.3
  Top Layer w7: U47.6@8109.25,5957.64 8162.36,5957.64 8195.8,5924.2 8224.21,5924.2 ; 8225,5925 8400,5750 J2.26@8410,5750
NetJ2_27: J2.27 U47.8 | length 522.9
  Top Layer w7: U47.8@8109.25,5989.13 8159.13,5989.13 8170,6000 8200,6000 8410,5790 8470,5790 J2.27@8520,5840
NetJ2_28: J2.28 U47.9 | length 391.6
  Top Layer w7: U47.9@8109.25,6004.88 8154.88,6004.88 8170,6020 8210,6020 8390,5840 J2.28@8420,5840
NetJ2_29: J2.29 U47.11 | length 492.1
  Top Layer w7: U47.11@8109.25,6036.38 8223.62,6036.38 8370,5890 8470,5890 J2.29@8520,5940
NetJ2_30: J2.30 U47.12 | length 357.2
  Top Layer w7: U47.12@8109.25,6052.13 8247.87,6052.13 8360,5940 J2.30@8420,5940
NetJ2_31: J2.31 U47.13 | length 463.7
  Top Layer w7: U47.13@8109.25,6067.87 8282.13,6067.87 8360,5990 8470,5990 J2.31@8520,6040
NetJ2_32: J2.32 U47.14 | length 328.8
  Top Layer w7: U47.14@8109.25,6083.62 8326.38,6083.62 8370,6040 J2.32@8420,6040
NetJ2_33: J2.33 U47.16 | length 431.9
  Top Layer w7: U47.16@8109.25,6115.12 8334.88,6115.12 8360,6090 8460,6090 J2.33@8510,6140
NetJ2_34: J2.34 U47.17 | length 314.5
  Top Layer w7: U47.17@8109.25,6130.87 8410.87,6130.87 J2.34@8420,6140
NetJ2_35: J2.35 U47.19 | length 442.9
  Top Layer w7: U47.19@8109.25,6162.36 8362.36,6162.36 8390,6190 8470,6190 J2.35@8520,6240
NetJ2_36: J2.36 U47.20 | length 336.4
  Top Layer w7: U47.20@8109.25,6178.11 8338.11,6178.11 8400,6240 J2.36@8420,6240
NetJ2_37: J2.37 U47.22 | length 464.8
  Top Layer w7: U47.22@8109.25,6209.61 8239.61,6209.61 8320,6290 8470,6290 J2.37@8520,6340
NetJ2_38: J2.38 U47.23 | length 378.2
  Top Layer w7: U47.23@8109.25,6225.35 8225.35,6225.35 8340,6340 J2.38@8440,6340
NetO1_1: O1.1 R34.1 | length 294.9
  Top Layer w16: R34.1@6430,3690 6430,3590 6490,3530 O1.1@6490,3420
NetO1_2: O1.2 R35.1 U37.3 | length 703
  Top Layer w16: O1.2@6390,3420 6390,3520 6297.4,3612.6 6297.4,3797.4 6310,3810 6310,3950 6340,3980 6370,3980 6380,3970 U37.3@6422.87,3970
NetO2_1: O2.1 R36.2 | length 480.8
  Top Layer w11: R36.2@5920,3802.6 5967.4,3802.6 v1(5980,3790)
  MidLayer1 w8: v1(5980,3790) 6020,3750 6020,3490 O2.1@6090,3420
NetR1_2: R1.2 U42.54 | length 213.2
  Top Layer w8: U42.54@5082.17,5402.83 5242.83,5402.83 R1.2@5280,5440
NetR2_1: R2.1 U42.74 | length 672.5
  Top Layer w8: U42.74@5082.17,5796.54 5146.54,5796.54 5360,6010 5360,6140 5330,6170 5280,6170 5246.54,6203.46 R2.1@5246.54,6240
NetR3_1: R3.1 U42.53 | length 222.2
  Top Layer w8: U42.53@5082.17,5383.15 5146.85,5383.15 5190,5340 R3.1@5286.54,5340
NetR4_2: R4.2 U42.75 | length 234.3
  Top Layer w8: U42.75@5082.17,5816.22 5082.17,5832.17 5180,5930 R4.2@5180,6010
NetR5_2: R5.2 U42.80 | length 240.6
  Top Layer w8: U42.80@4937.48,5882.17 4937.48,5947.48 5016.54,6026.54 R5.2@5080,6026.54
NetR6_1: R6.1 U42.79 | length 368.7
  Top Layer w8: U42.79@4957.17,5882.17 4957.17,5927.17 5000,5970 5100,5970 5130,6000 5130,6050 R6.1@5180,6100
NetR7_1: R7.1 U42.96 | length 256.1
  Top Layer w8: U42.96@4622.52,5882.17 4622.52,6075.98 R7.1@4666.54,6120
NetR8_2: R8.2 U42.97 | length 151.4
  Top Layer w8: R8.2@4570,6020 4602.83,5987.17 U42.97@4602.83,5882.17
NetR9_1: R9.1 U42.1 | length 285
  Top Layer w8: v1(4280,5890) 4316.54,5890 R9.1@4320,5886.54 ; U42.1@4477.83,5816.22 v1(4477.83,5842.17)
  MidLayer2 w10: v1(4280,5890) 4300,5870 4450,5870 v1(4477.83,5842.17)
NetR10_2: R10.2 U42.2 | length 357.5
  Top Layer w8: v1(4280,5790) 4283.46,5793.46 R10.2@4320,5793.46 ; U42.2@4477.83,5796.54 4516.54,5796.54 v1(4530,5810)
  MidLayer2 w10: v1(4280,5790) 4300,5810 v1(4530,5810)
NetR12_2: R12.2 U42.52 | length 236.1
  Top Layer w10: U42.52@5082.17,5363.46 5126.54,5363.46 5130,5360 5130,5196.54 R12.2@5146.54,5180
NetR13_2: R13.2 U42.99 | length 452.7
  Top Layer w10: U42.99@4563.46,5882.17 v1(4563.46,5966.54) ; v1(4690,6220) 4710,6220 R13.2@4740,6250
  MidLayer1 w8: v1(4563.46,5966.54) 4630,6033.07 4630,6160 v1(4690,6220)
NetR14_2: R14.2 U43.54 | length 242.1
  Top Layer w8: U43.54@6277.17,5882.17 6277.17,5987.17 6320,6030 R14.2@6320,6106.54
NetR15_1: R15.1 U43.74 | length 266.1
  Top Layer w8: U43.74@5883.46,5882.17 5883.46,5943.46 6000,6060 R15.1@6000,6100
NetR16_1: R16.1 U43.53 | length 260.6
  Top Layer w8: U43.53@6296.85,5882.17 U43.53@6296.85,5890 ; R16.1@6440,6060 R16.1@6450,6060
  Top Layer w10: U43.53@6296.85,5890 6296.85,5956.85 6400,6060 R16.1@6430,6060
NetR17_2: R17.2 U43.75 | length 162.8
  Top Layer w8: U43.75@5863.78,5882.17 5863.78,5953.78 5900,5990 R17.2@5900,6030
NetR18_2: R18.2 U43.80 | length 216.5
  Top Layer w8: R18.2@5613.46,5660 5650,5660 5727.48,5737.48 U43.80@5797.83,5737.48
NetR19_1: R19.1 U43.79 | length 142.2
  Top Layer w8: R19.1@5660,5746.54 5670.63,5757.17 U43.79@5797.83,5757.17
NetR20_1: R20.1 U43.96 | length 192.7
  Top Layer w8: R20.1@5620,5386.54 5656.54,5386.54 5692.52,5422.52 U43.96@5797.83,5422.52
NetR21_2: R21.2 U43.97 | length 303.9
  Top Layer w8: R21.2@5520,5340 5670,5340 5732.83,5402.83 U43.97@5797.83,5402.83
NetR22_1: R22.1 U43.1 | length 215.2
  Top Layer w10: R22.1@5773.46,5100 5773.46,5133.46 5863.78,5223.78 U43.1@5863.78,5277.83
NetR23_2: R23.2 U43.2 | length 184.8
  Top Layer w10: R23.2@5866.54,5100 5883.46,5116.93 U43.2@5883.46,5277.83
NetR25_2: R25.2 U43.52 | length 292.7
  Top Layer w10: U43.52@6316.54,5882.17 6316.54,5926.54 6376.54,5986.54 R25.2@6540,5986.54
NetR26_2: R26.2 U43.99 | length 480.4
  Top Layer w10: R26.2@5393.46,5180 5550,5180 5733.46,5363.46 U43.99@5797.83,5363.46
NetR28_2: R28.2 U35.22 | length 711.8
  Top Layer w8: R28.2@5780,4755.12 5834.88,4755.12 v1(5880,4710) ; U35.22@6340,4745 6385,4745 6390,4740 v1(6390,4730) 6380.97,4720.97
  Bottom Layer w8: v1(5880,4710) 6020,4710 6040,4730 v1(6390,4730)
NetR29_2: R29.2 U35.23 | length 767.6
  Top Layer w8: R29.2@5780,4884.88 v1(5855.12,4884.88) ; U35.23@6340,4770 6410,4770 v1(6420,4780)
  Bottom Layer w8: v1(5855.12,4884.88) 5900,4840 6010,4840 6070,4780 v1(6420,4780)
NetR30_1: R30.1 R31.2 U38.7 | length 650.7
  Top Layer w7: v1(6650,6170) 6760,6060 6760,5926.54 R30.1@6820,5866.54 ; v1(6650,6250) 6658.39,6241.61 U38.7@6708.78,6241.61 ; R30.1@6820,5870 6836.54,5870 R31.2@6920,5953.46
  MidLayer1 w8: v1(6650,6170) v1(6650,6250)
NetR31_1: R31.1 U36.99 | length 1551.1
  Top Layer w10: v1(6870,4510) 6903.46,4543.46 U36.99@6937.83,4543.46 ; v1(6910,5820) 6920,5830 R31.1@6920,5886.54
  MidLayer1 w8: v1(6870,4510) 6860,4510 6790,4580 6790,5130 6910,5250 v1(6910,5820)
NetR32_1: R32.1 U36.52 | length 314.1
  Top Layer w10: U36.52@7456.54,5062.17 7456.54,5236.54 7480,5260 R32.1@7480,5366.54
NetR32_2: R32.2 U38.3 | length 1545.5
  Top Layer w7: v1(6600,6320) 6623.98,6343.98 U38.3@6708.78,6343.98 ; v1(6810,6230) v1(7010,6030) ; v1(7420,5600) 7480,5540 R32.2@7480,5433.46
  MidLayer1 w8: v1(7260,5960) 7260,5770 7420,5610 v1(7420,5600)
  Bottom Layer w10: v1(6600,6320) 6630,6290 6670,6290 6730,6230 v1(6810,6230) ; v1(7010,6030) 7190,6030 v1(7260,5960)
NetR33_2: R33.2 U36.97 | length 2731.1
  Top Layer w10: U36.97@6937.83,4582.83 6897.17,4582.83 6863.74,4616.26 6820,4572.51 6820,4480 6870,4430 6870,4150 7260,3760 R33.2@8846.54,3760
NetR36_1: R36.1 U42.34 | length 2430.3
  Top Layer w10: v1(4670,5360) 4701.26,5328.74 U42.34@4701.26,5277.83
  Top Layer w16: v1(5850,3940) 5912.6,3877.4 R36.1@5920,3877.4
  MidLayer2 w10: v1(4670,5360) 4670,5315.36 4660,5305.36 4660,5180 4700,5140 4700,4540 5300,3940 v1(5850,3940)
NetR40_2: R40.2 U36.78 | length 1861.1
  Top Layer w7: U36.78@6937.83,4956.85 v1(7036.85,4956.85) ; v1(7400,6260) R40.2@7400,6426.54
  MidLayer1 w8: v1(7030,5430) 7060,5400 7060,5200 7036.85,5176.85 v1(7036.85,4956.85)
  MidLayer2 w8: v1(7030,5430) 7080,5430 7170,5520 7170,6180 7220,6230 7370,6230 v1(7400,6260)
NetR41_2: R41.2 U36.77 | length 1632.5
  Top Layer w7: U36.77@6937.83,4976.54 6893.46,4976.54 6880,4990 6880,5150 v1(6990,5260) ; v1(7010,5730) 7150,5870 7150,6290 7200,6340 R41.2@7200,6426.54
  MidLayer1 w8: v1(6990,5260) 6990,5710 v1(7010,5730)
NetR42_1: R42.1 U38.17 | length 556.4
  Top Layer w7: U38.17@6931.22,6318.39 v1(6998.39,6318.39) ; R42.1@7300,6493.46 v1(7300,6550)
  Bottom Layer w10: v1(6998.39,6318.39) 7080,6400 7080,6460 7170,6550 v1(7300,6550)
NetR42_2: R42.2 U36.100 | length 2229.1
  Top Layer w7: U36.100@6937.83,4523.78 6983.78,4523.78 v1(7050,4590) ; R42.2@7300,6440 7300,6420 7230,6350 7230,6270 7260,6240 7280,6240 v1(7340,6180)
  MidLayer2 w8: v1(7050,4590) 7050,4650 7330,4930 7330,5470 7380,5520 7380,5760 7340,5800 v1(7340,6180)
NetU1_1: U1.1 U1.2 U5.13 | length 1899.4
  Top Layer w16: U1.1@2790,4097.64 2790,4040 2800,4030 2830,4030 2840,4040 U1.2@2840,4110 ; v1(2810,3970) 2810,4030 ; U5.13@3720.75,4869.09 3720.75,4699.25 v1(3780,4640)
  MidLayer1 w16: v1(2810,3970) 3070,3970 3200,4100 3200,4340 3390,4530 3690,4530 3780,4620 v1(3780,4640)
NetU1_6: U1.6 U1.7 U5.11 | length 1476.7
  Top Layer w16: U1.6@3040,4097.64 3040,4050 3060,4030 3080,4030 3090,4040 U1.7@3090,4097.64 ; v1(3500,4560) 3550,4610 3590,4610 3669.57,4689.57 U5.11@3669.57,4869.09
  MidLayer1 w16: v1(3060,4020) 3170,4130 3170,4510 3200,4540 3340,4540 3360,4560 v1(3500,4560)
  MidLayer2 w16: 3060,4000 v1(3060,4020)
NetU1_8: U1.8 U1.9 U5.9 | length 1021.1
  Top Layer w16: U1.9@3040,4302.36 3040,4350 3090,4400 3290,4400 3360,4470 3360,4500 3490,4630 3500,4630 3618.39,4748.39 U5.9@3618.39,4869.09 ; 3060,4370 3080,4370 3090,4360 U1.8@3090,4302.36
NetU1_13: U1.13 U1.14 U5.7 | length 1383.7
  Top Layer w16: v1(2740,4350) 2740,4310 2747.64,4302.36 U1.14@2790,4302.36 2790,4350 2807,4367 2823,4367 2840,4350 U1.13@2840,4302.36 ; v1(2910,4520) 3100,4520 3146.2,4566.2 3146.2,4636.2 3220,4710 3490,4710 3567.2,4787.2 U5.7@3567.2,4869.09
  MidLayer1 w16: v1(2740,4350) v1(2910,4520)
NetU2_1: U2.1 U2.2 U5.12 | length 1281.4
  Top Layer w16: U2.1@2790,4677.64 2790,4620 2800,4610 2830,4610 2840,4620 U2.2@2840,4677.64 ; v1(3650,4610) 3695.16,4655.16 U5.12@3695.16,4869.09
  MidLayer1 w16: v1(2820,4610) v1(3650,4610)
NetU2_6: U2.6 U2.7 U5.10 | length 966.4
  Top Layer w16: U2.6@3040,4677.64 3040,4630 3050,4620 3080,4620 3090,4630 3090,4650 U2.7@3090,4677.64 ; U2.7@3090,4690 v1(3130,4690) ; v1(3610,4680) 3643.98,4713.98 U5.10@3643.98,4869.09
  MidLayer1 w16: v1(3130,4690) 3180,4640 3570,4640 v1(3610,4680) 3610,4670 3580,4640
NetU2_8: U2.8 U2.9 U5.8 | length 894.9
  Top Layer w16: U2.9@3040,4882.36 3040,4940 3050,4950 3070,4950 3090,4930 U2.8@3090,4882.36 3102.36,4870 v1(3150,4870) ; v1(3510,4680) 3592.8,4762.8 U5.8@3592.8,4869.09
  MidLayer1 w16: v1(3150,4870) 3340,4680 v1(3510,4680)
NetU2_13: U2.13 U2.14 U5.6 | length 1260.4
  Top Layer w16: v1(2740,4880) U2.14@2780,4880 ; U2.14@2790,4870 2790,4920 2820,4950 2840,4930 U2.13@2840,4882.36 ; v1(3100,5010) 3360,4750 3490,4750 3541.61,4801.61 U5.6@3541.61,4869.09
  MidLayer1 w16: v1(2740,4880) 2870,5010 v1(3100,5010)
NetU3_1: U3.1 U3.2 U5.5 | length 1132.5
  Top Layer w16: U3.1@2790,5230 2790,5160 2810,5140 2830,5140 2840,5150 U3.2@2840,5217.64 ; 2820,5150 2820,5110 v1(2830,5100) ; v1(3390,4790) 3490,4790 3516.02,4816.02 U5.5@3516.02,4869.09
  MidLayer1 w16: v1(2830,5100) 3080,5100 v1(3390,4790)